# Altium PCB CW308T_EMF32TG11.PcbDoc
Units mil, origin at the board's own origin, x right, y up, seen from the top; angles counter-clockwise.
Board outline 2055 x 2540 mil, 2 copper layers (Top Layer, Bottom Layer); 13 components, 20 nets, 135 pads, 26 vias.
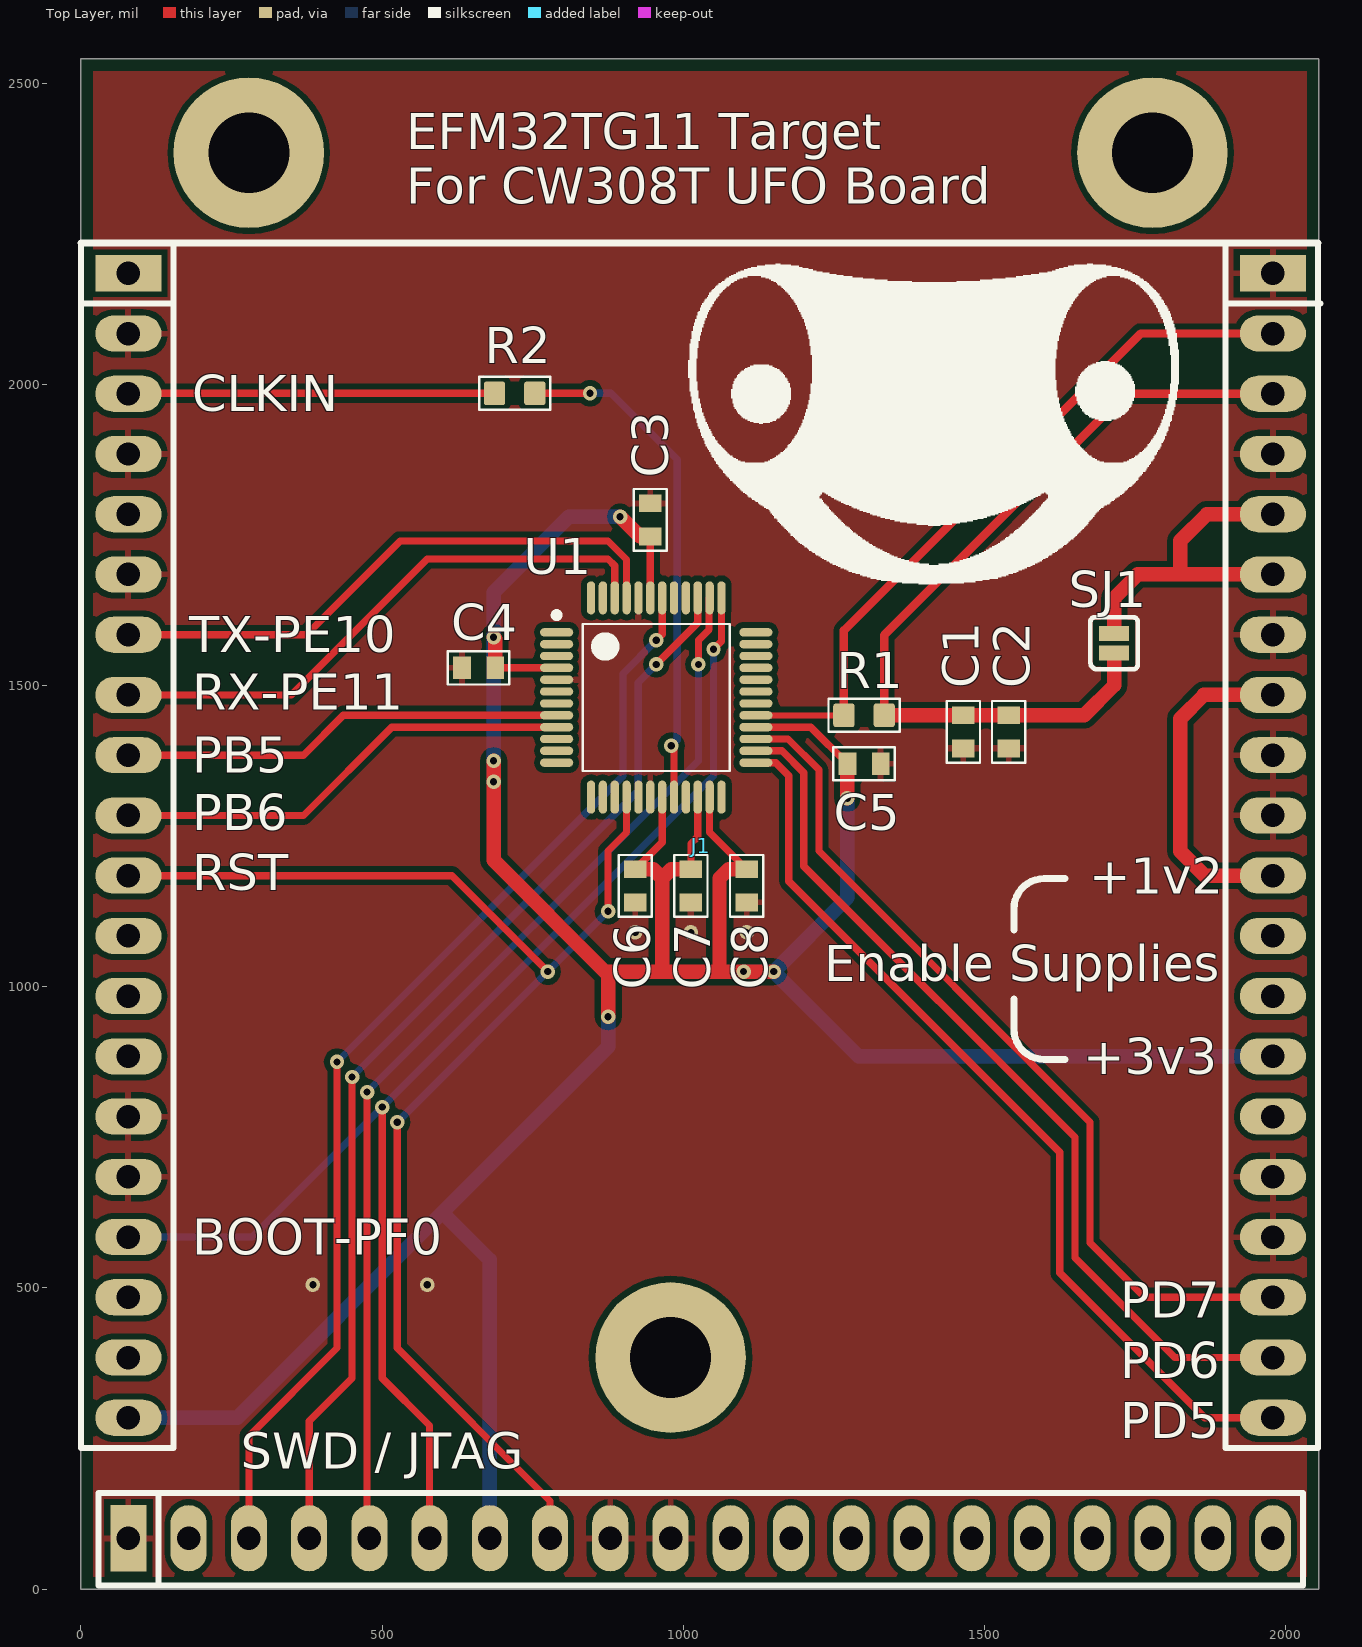
[diagram p0: Top Layer view]
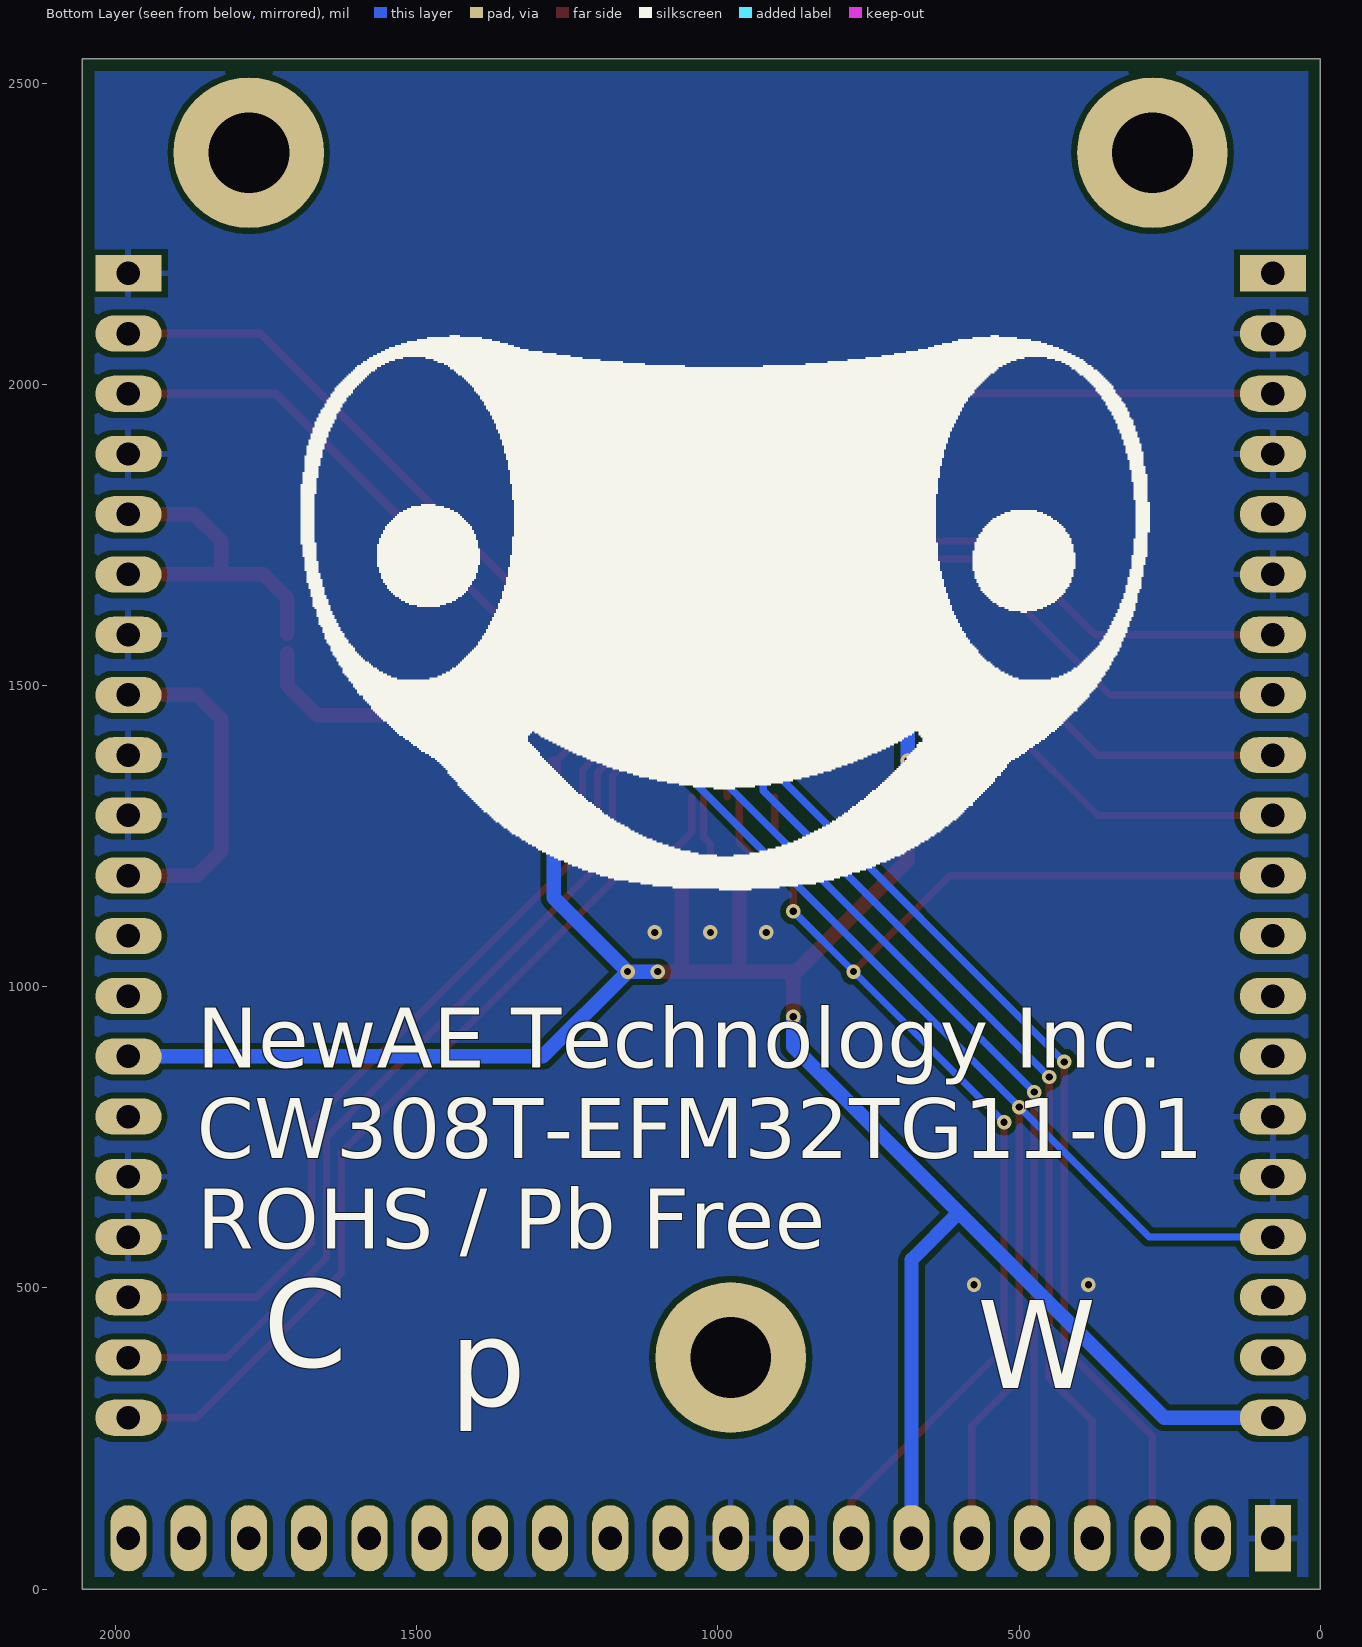
[diagram p1: Bottom Layer view, seen from below]

## Layer stack, top to bottom
Top Solder: solder mask 0.4, Solder Resist, Dk 3.5
Top Layer: signal copper 1.4
Dielectric 1: dielectric 12.6, FR-4, Dk 4.8
Bottom Layer: signal copper 1.4
Bottom Solder: solder mask 0.4, Solder Resist, Dk 3.5

## Board outline
0,0 2055,0 2055,2540 0,2540

## Design rules (kind name [scope] priority, off if disabled: settings)
BoardOutlineClearance Silk_to_Outline [(OnLayer('Top Overlay'))] p1: gap=0 ignorepadtopadclearanceinfootprint=FALSE
BoardOutlineClearance [All] p2: gap=20 ignorepadtopadclearanceinfootprint=FALSE
Clearance Clearance_Power [InNet('+*') OR InNet('-*') OR InNet('GND')] p1: gap=10 ignorepadtopadclearanceinfootprint=FALSE
Clearance [All] p2: gap=6 ignorepadtopadclearanceinfootprint=FALSE except(0: Arc-Hole Track-Hole SMDPad-Hole THPad-Hole Via-Hole Fill-Hole Poly-Hole Region-Hole Text-Hole)
HoleSize [All] p1: absolutevalues=TRUE maxlimit=200 minlimit=1 maxpercent=80.000 minpercent=20.000
MinimumSolderMaskSliver [All] p1: minsoldermaskwidth=5
PlaneConnect PlaneConnect_viaDirect [IsVia] p1: planeconnectstyle=Direct reliefexpansion=20 reliefentries=4 reliefconductorwidth=10 reliefairgap=10
PlaneConnect [All] p2: planeconnectstyle=Relief reliefexpansion=20 reliefentries=4 reliefconductorwidth=10 reliefairgap=10
PolygonConnect PolygonConnect_viaDirect [All vs isVia] p1: connectstyle=Direct reliefconductorwidth=10 reliefentries=4 polygonreliefangle="90 Angle" airgapwidth=10
PolygonConnect [All] p2: connectstyle=Relief reliefconductorwidth=10 reliefentries=4 polygonreliefangle="90 Angle" airgapwidth=10
RoutingVias [All] p1: holewidth=28 width=50 viastyle="Through Hole" minholewidth=28 minwidth=50 maxholewidth=28 maxwidth=50 useviatemplates=TRUE viatemplateguid#1={1A3752DF-5185-4C8F-B12F-78C2E36E3B79} viatemplateguid#2={10C6E2E2-26C8-43AE-A37D-40FB085232FA} viatemplateguid#3={3CB7D92B-ADEE-4C2B-B6B5-F2CE337C13DB} viatemplatename#1=v61h30m0mx0 viatemplatename#2=v86h41m0mx0 viatemplatename#3=v127h71m0mx0
SilkToSilkClearance [All] p1: silktosilkclearance=5
SilkToSolderMaskClearance [IsPad] p1: minsilkscreentomaskgap=5 clearancetoexposedcopper=TRUE
SolderMaskExpansion [All] p1: expansion=4
Width [All] p1: maxlimit=100 minlimit=6 preferedwidth=8 minimp=50.000000 maximp=50.000000 favimp=50.000000
25 further rules are at their usual default settings.

## Components (designator, comment, footprint, x,y, rotation, side; value= is the part's Value field where it differs from the comment)
C1 "100n" CAPC0603_M 1465,1422.91 r270 top
C2 "2u2" CAPC0603_M 1540,1422.91 r270 top
C3 "100n" CAPC0603_M 945,1775 r90 top
C4 "100n" CAPC0603_M 660,1529.21 r180 top
C5 "100n" CAPC0603_M 1300,1370 r0 top
C6 "100n" CAPC0603_M 920,1167.44 r270 top
C7 "100n" CAPC0603_M 1012.5,1167.44 r270 top
C8 "100n" CAPC0603_M 1105,1167.44 r270 top
J1 "CW308_TARGETCON" CW308_TBOARD_CONN 78.74,2184.25 r0 top locked
R1 "22R" RESC1608X55N 1300,1450.47 r0 top
R2 "22R" RESC1608X55N 720,1985 r180 top
SJ1 "NO" SJ_2S_NO 1715,1570 r90 top
U1 "EMF32TG11B3" TQFP48-P900X900X120 955,1480 r0 top locked

## Footprints (in the part's own frame and the unit in brackets; to place one, negate y for a bottom-side part, rotate by r counter-clockwise, add the part's x,y. Pads: shape width x height; smd on the part's side, far side on the other; paste and mask are expansions set on the pad)
CAPC0603_M [mm]
  rect 0.75x0.95 smd: 1(-0.7,0) 2(0.7,0)
  silkscreen extent -1.3,-0.7 1.3,0.7, body extent -0.85,-0.45 0.85,0.45, height 0.9
CW308_TBOARD_CONN [mil]
  rect 110x60 hole 39: A1(0,0) C1(1900,0)
  oval 110x60 hole 39: A2(0,-100) A3(0,-200) A4(0,-300) A5(0,-400) A6(0,-500) A7(0,-600) A8(0,-700) A9(0,-800) A10(0,-900) A11(0,-1000) A12(0,-1100) A13(0,-1200) A14(0,-1300) A15(0,-1400) A16(0,-1500) A17(0,-1600) A18(0,-1700) A19(0,-1800) A20(0,-1900) C2(1900,-100) C3(1900,-200) C4(1900,-300) C5(1900,-400) C6(1900,-500) C7(1900,-600) C8(1900,-700) C9(1900,-800) C10(1900,-900) C11(1900,-1000) C12(1900,-1100) C13(1900,-1200) C14(1900,-1300) C15(1900,-1400) C16(1900,-1500) C17(1900,-1600) C18(1900,-1700) C19(1900,-1800) C20(1900,-1900)
  rect 60x110 hole 39: B1(0,-2100)
  oval 60x110 hole 39: B2(100,-2100) B3(200,-2100) B4(300,-2100) B5(400,-2100) B6(500,-2100) B7(600,-2100) B8(700,-2100) B9(800,-2100) B10(900,-2100) B11(1000,-2100) B12(1100,-2100) B13(1200,-2100) B14(1300,-2100) B15(1400,-2100) B16(1500,-2100) B17(1600,-2100) B18(1700,-2100) B19(1800,-2100) B20(1900,-2100)
  round 250 hole 134: MH1(200,200) MH2(900,-1800) MH2(1700,200)
  silkscreen extent -79,-2179 1979,50, body extent -50,-2149 1950,50, height 48
RESC1608X55N [mm] "Chip Resistor, Body 1.6x0.8mm, EIA 0603, IPC Medium Density"
  round 0.254 on Mech15: 0(0,0)
  rrect25% 0.9x1 smd: 1(-0.85,0) 2(0.85,0)
  Top Layer pour cut-out: -0.6,0.5 0.6,0.5 0.6,-0.5 -0.6,-0.5
  silkscreen extent -1.5,-0.7 1.5,0.7, body extent -0.87,-0.47 0.88,0.48, height 0.54
SJ_2S_NO [mil] "Solder Jumper, open (no paste)"
  rect 25x50 smd paste-393.7: 1(-16.22,0) 2(16.22,0)
  silkscreen extent -43,-39 43,39
TQFP48-P900X900X120 [mm] "TSQFP, 48-Leads, Body 7.00x7.00mm, Pitch 0.50mm, IPC Medium Density"
  oval 1.4x0.35 smd: 1(-4.2,2.75) 2(-4.2,2.25) 3(-4.2,1.75) 4(-4.2,1.25) 5(-4.2,0.75) 6(-4.2,0.25) 7(-4.2,-0.25) 8(-4.2,-0.75) 9(-4.2,-1.25) 10(-4.2,-1.75) 11(-4.2,-2.25) 12(-4.2,-2.75) 25(4.2,-2.75) 26(4.2,-2.25) 27(4.2,-1.75) 28(4.2,-1.25) 29(4.2,-0.75) 30(4.2,-0.25) 31(4.2,0.25) 32(4.2,0.75) 33(4.2,1.25) 34(4.2,1.75) 35(4.2,2.25) 36(4.2,2.75)
  oval 0.35x1.4 smd: 13(-2.75,-4.2) 14(-2.25,-4.2) 15(-1.75,-4.2) 16(-1.25,-4.2) 17(-0.75,-4.2) 18(-0.25,-4.2) 19(0.25,-4.2) 20(0.75,-4.2) 21(1.25,-4.2) 22(1.75,-4.2) 23(2.25,-4.2) 24(2.75,-4.2) 37(2.75,4.2) 38(2.25,4.2) 39(1.75,4.2) 40(1.25,4.2) 41(0.75,4.2) 42(0.25,4.2) 43(-0.25,4.2) 44(-0.75,4.2) 45(-1.25,4.2) 46(-1.75,4.2) 47(-2.25,4.2) 48(-2.75,4.2)
  silkscreen extent -4.32,-3.1 3.1,3.6, body extent -4.5,-4.5 4.5,4.5, height 1.2

## Part data
C1 C3 C4 C5 C6 C7 C8: library part CCHIP-100n-0603, "100n, 0603", Case-EIA=0603, Case-Metric=1608, Manufacture 1=Kemet, Manufacture Part Number 1=C0603C104K5RACTU, Rated Voltage=50VDC, Supplier Part Number 1=399-5089-2-ND, Component Group=Capacitor, Component Type=Standard, Mounting Technology=SMT, Part Number=CCHIP-100n-0603, Pin Count=2, Supplier 1=Digi-Key
C2: library part CCHIP-2u2-0603, "2u2, 0603", Case-EIA=0603, Case-Metric=1608, Manufacture 1=Samsung, Manufacture Part Number 1=CL10B225KP8NNNC, Rated Voltage=10VDC, Supplier Part Number 1=1276-1134-2-ND, Component Group=Capacitor, Component Type=Standard, Mounting Technology=SMT, Part Number=CCHIP-2u2-0603, Pin Count=2, Supplier 1=Digi-Key
J1: library part CW308_TBOARD, "CW308 \"Standard\" Target Board Connector", Component Group=Mechanical, Component Type=Standard, Mounting Technology=Through-hole, Part Number=CW308_TBOARD, Pin Count=60, Pitch=2.54mm
R1 R2: library part RCHIP-22R-0603, "22R res, 0603, 1%, 1/10W", Case-EIA=0603, Case-Metric=1608, Manufacture 1=Yageo, Manufacture Part Number 1=RC0603FR-0722RL, Rated Power=0.1W, Rated Voltage=75VDC, Supplier Part Number 1=311-22.0HRCT-ND, Temperature Range="-55C to 155C", Tolerance=1%, Component Group=Resistor, Component Type=Standard, Mounting Technology=SMT, Part Number=RCHIP-22R-0603, Pin Count=2, Supplier 1=Digi-Key
SJ1: library part SJ_2S_NO, "Solder Jumper, NO", Component Group="PCB Feature", Component Type="Standard (No BOM)", Mounting Technology=COPPER, Part Number=SJ_2S_NO, Pin Count=2
U1: "MCU EMF32 Tiny Gecko 11 64kB 32kB 37 GPIO", Manufacture 1="Silicon Labs", Manufacture Part Number 1=EFM32TG11B340F64IQ48-A, Supplier Part Number 1=634-11B340F64IQ48A, Component Group="Digital IC", Component Type=Standard, Mounting Technology=SMT, Part Number=EMF32TG11B3, Pin Count=48, PP Material Stack=0, PP Rotation=0, RoHS=Yes, Supplier 1=Mouser

## Via types
v1: diameter 24, hole 12, Top Layer to Bottom Layer, tented both sides, 26 vias

## Nets (pads, with @x,y where several pads share a name; then routed paths per layer and width w, separated by ;. In a path a pad name is that pad's centre, name@x,y a point inside that pad or via, vN(x,y) a via of type N, cw(c..) or ccw(c..) an arc to the next point about the centre after c; other vN are vias at no path point)
+3v3: C3.1 C4.1 C5.1 C6.1 C7.1 C8.1 J1.A20 J1.B7 J1.C14 U1.4 U1.19 U1.22 U1.23 U1.28 U1.43 | length 5738.6
  Top Layer w12: C4.1 U1.4 ; C6.1 964.84,1239.84 U1.19 ; C3.1 945.16,1747.28 U1.43 ; C7.1 1012.5,1237.5 1023.9,1248.9 U1.22 ; U1.23 1043.58,1256.42 C8.1 ; U1.28 1211.65,1430.79 C5.1
  Top Layer w24: v1(685,1375) v1(685,1340) 685,1210 870,1025 ; v1(685,1580) 687.56,1577.44 C4.1 ; v1(875,950) 875,1020 870,1025 ; v1(895,1780) 927.56,1747.44 C3.1 ; C6.1 950,1195 965,1180 ; C7.1 980,1195 965,1180 ; C8.1 1075,1195 1060,1180 1060,1025 ; v1(1150,1025) v1(1100,1025) 1060,1025 ; v1(1272.44,1312.44) C5.1 ; 870,1025 965,1025 ; 965,1025 1060,1025 ; 965,1025 965,1180
  Bottom Layer w24: J1.A20 259.25,284.25 600,625 ; J1.B7 678.74,546.26 600,625 ; v1(685,1340) v1(685,1375) v1(685,1580) 685,1655 810,1780 v1(895,1780) ; v1(875,950) 875,900 600,625 ; v1(1100,1025) v1(1150,1025) ; v1(1272.44,1312.44) 1272.44,1147.44 v1(1150,1025) ; J1.C14 1290.75,884.25 v1(1150,1025)
BOOT: J1.A17 J1.B6 U1.37 | length 2337.7
  Top Layer w12: v1(500,800) 500,350 578.74,271.26 J1.B6 ; v1(1050,1560) 1063.27,1573.27 U1.37
  Bottom Layer w12: J1.A17 284.25,584.25 1050,1350 v1(1050,1560)
CLKIN: R2.1 U1.20 | length 848.5
  Top Layer w12: R2.1 v1(845,1985) ; v1(980,1400) 984.53,1395.47 U1.20
  Bottom Layer w12: v1(845,1985) 880,1985 990,1875 990,1410 v1(980,1400)
FILT: J1.C5 J1.C6 SJ1.2 | length 566.6
  Top Layer w24: SJ1.2 1715,1645 1754.25,1684.25 1825,1684.25 ; J1.C6 1825,1684.25 ; J1.C5 1869.25,1784.25 1825,1740 1825,1684.25
GND: C1.2 C2.2 C3.2 C4.2 C5.2 C6.2 C7.2 C8.2 J1.A2 J1.A4 J1.A6 J1.A15 J1.A16 J1.B1 J1.B9 J1.B10 J1.C1 J1.C4 J1.C7 J1.C9 J1.C10 J1.C16 J1.C17 U1.5 U1.18 U1.44
  other v1: 385,505 575,505 920,1090 1012.5,1090 1105,1090
GPIO3: J1.A9 U1.8 | length 738.3
  Top Layer w12: J1.A9 369.25,1384.25 435.47,1450.47 U1.8
GPIO4: J1.A10 U1.9 | length 771.6
  Top Layer w12: J1.A10 369.25,1284.25 515.79,1430.79 U1.9
NetJ1_A3: J1.A3 R2.2 | length 614.1
  Top Layer w12: J1.A3@82.99,1980 J1.A3 79.49,1985 R2.2
NetJ1_C8: J1.C8 J1.C11 | length 560.6
  Top Layer w24: J1.C11 1865.75,1184.25 1825,1225 1825,1445 1864.25,1484.25 J1.C8
PD5: J1.C20 U1.25 | length 1528.5
  Top Layer w12: U1.25 1153.27,1371.73 1175,1350 1175,1175 1625,725 1625,525 1865.75,284.25 J1.C20
PD6: J1.C19 U1.26 | length 1483.5
  Top Layer w12: U1.26 1163.58,1391.42 1200,1355 1200,1200 1650,750 1650,550 1815.75,384.25 J1.C19
PD7: J1.C18 U1.27 | length 1438.5
  Top Layer w12: U1.27 1173.9,1411.1 1225,1360 1225,1225 1675,775 1675,575 1765.75,484.25 J1.C18
RST: J1.A11 J1.B8 U1.16 | length 2255.4
  Top Layer w12: J1.A11 615.75,1184.25 v1(775,1025) ; v1(525,775) 525,400 778.74,146.26 J1.B8 ; v1(875,1125) 875,1225 905.79,1255.79 U1.16
  Bottom Layer w12: v1(525,775) v1(775,1025) v1(875,1125)
SHUNTH: C1.1 C2.1 J1.C3 R1.2 SJ1.1 | length 1400.1
  Top Layer w14: R1.2 1333.46,1583.46 1734.25,1984.25 J1.C3
  Top Layer w24: R1.2 C1.1 C2.1 1665.47,1450.47 1715,1500 SJ1.1
SHUNTL: J1.C2 R1.1 U1.29 | length 1203.5
  Top Layer w10: U1.29 R1.1
  Top Layer w14: R1.1 1266.54,1591.54 1759.25,2084.25 J1.C2
SWDIO/TMS: J1.B5 U1.38 | length 1798.2
  Top Layer w12: v1(475,825) 475,87.99 J1.B5 ; v1(1025,1535) 1025,1575 1042.79,1592.79 1042.79,1644.56 U1.38
  Bottom Layer w12: v1(475,825) 1025,1375 v1(1025,1535)
TDI: J1.B3 U1.42 | length 1845.3
  Top Layer w12: J1.B3 278.74,253.74 425,400 v1(425,875) ; v1(955,1575) 964.84,1584.84 U1.42
  Bottom Layer w12: v1(425,875) 900,1350 900,1520 v1(955,1575)
TDO: J1.B4 U1.39 | length 1828.3
  Top Layer w12: J1.B4 378.74,278.74 450,350 v1(450,850) ; v1(955,1535) 1023.9,1603.9 U1.39
  Bottom Layer w12: v1(450,850) 925,1325 925,1505 v1(955,1535)
US0_RX: J1.A8 U1.46 | length 959
  Top Layer w12: J1.A8 349.25,1484.25 575,1710 875,1710 886.1,1698.9 U1.46
US0_TX: J1.A7 U1.45 | length 968.2
  Top Layer w12: J1.A7 374.25,1584.25 530,1740 875,1740 905.79,1709.21 U1.45
pads on no net: J1.A1 J1.A5 J1.A12 J1.A13 J1.A14 J1.A18 J1.A19 J1.B2 J1.B11 J1.B12 J1.B13 J1.B14 J1.B15 J1.B16 J1.B17 J1.B18 J1.B19 J1.B20 J1.C12 J1.C13 J1.C15 J1.MH1 J1.MH2 R1.0 R2.0 U1.1 U1.2 U1.3 U1.6 U1.7 U1.10 U1.11 U1.12 U1.13 U1.14 U1.15 U1.17 U1.21 U1.24 U1.30 U1.31 U1.32 U1.33 U1.34 U1.35 U1.36 U1.40 U1.41 U1.47 U1.48

## Polygon pours and split planes (outlines as drawn)
GND on Bottom Layer "GND_L02_P002" (solid, remove dead copper, pour order 2): 0,2539.37 2047.24,2539.37 2047.24,0 0,0
GND on Top Layer "GND_L01_P000" (solid, remove dead copper, pour order 0): 0,2539.37 2047.24,2539.37 2047.24,0 0,0

## Silkscreen, mask and mechanical layers (free items; w line width, h text height)
Top Overlay:
  drawing of 10 lines, arcs and shapes, not listed
  text "EFM32TG11 Target / For CW308T UFO Board" at 540,2300 h60
  text "CLKIN" at 185,1955 h60
  text "TX-PE10" at 180,1555 h60
  text "RX-PE11" at 185,1460 h60
  text "PB5" at 185,1355 h60
  text "PB6" at 185,1260 h60
  text "RST" at 185,1160 h60
  text "+1v2" at 1673.74,1154.25 h60
  text "Enable Supplies" at 1233.74,1009.25 h60
  text "+3v3" at 1663.74,854.25 h60
  text "BOOT-PF0" at 185,555 h60
  text "PD7" at 1725,450 h60
  text "PD6" at 1725,350 h60
  text "PD5" at 1725,250 h60
  text "SWD / JTAG" at 265,200 h60
Bottom Overlay:
  drawing of 3 lines, arcs and shapes, not listed
  text "NewAE Technology Inc. / CW308T-EFM32TG11-01 / ROHS / Pb Free" at 1865,565 h100
  text "C" at 1755,320 h250
  text "W" at 570,285 h250
  text "p" at 1445,255 h250
Mechanical 1:
  the board outline again, w10